# Altium PCB 24v_to_12v_adapter.PcbDoc
Units mm, origin at the board's own origin, x right, y up, seen from the top; angles counter-clockwise.
Board outline 34.61 x 21.07 mm, 2 copper layers (Top Layer, Bottom Layer); 1 components, 3 nets, 9 pads, 0 vias.
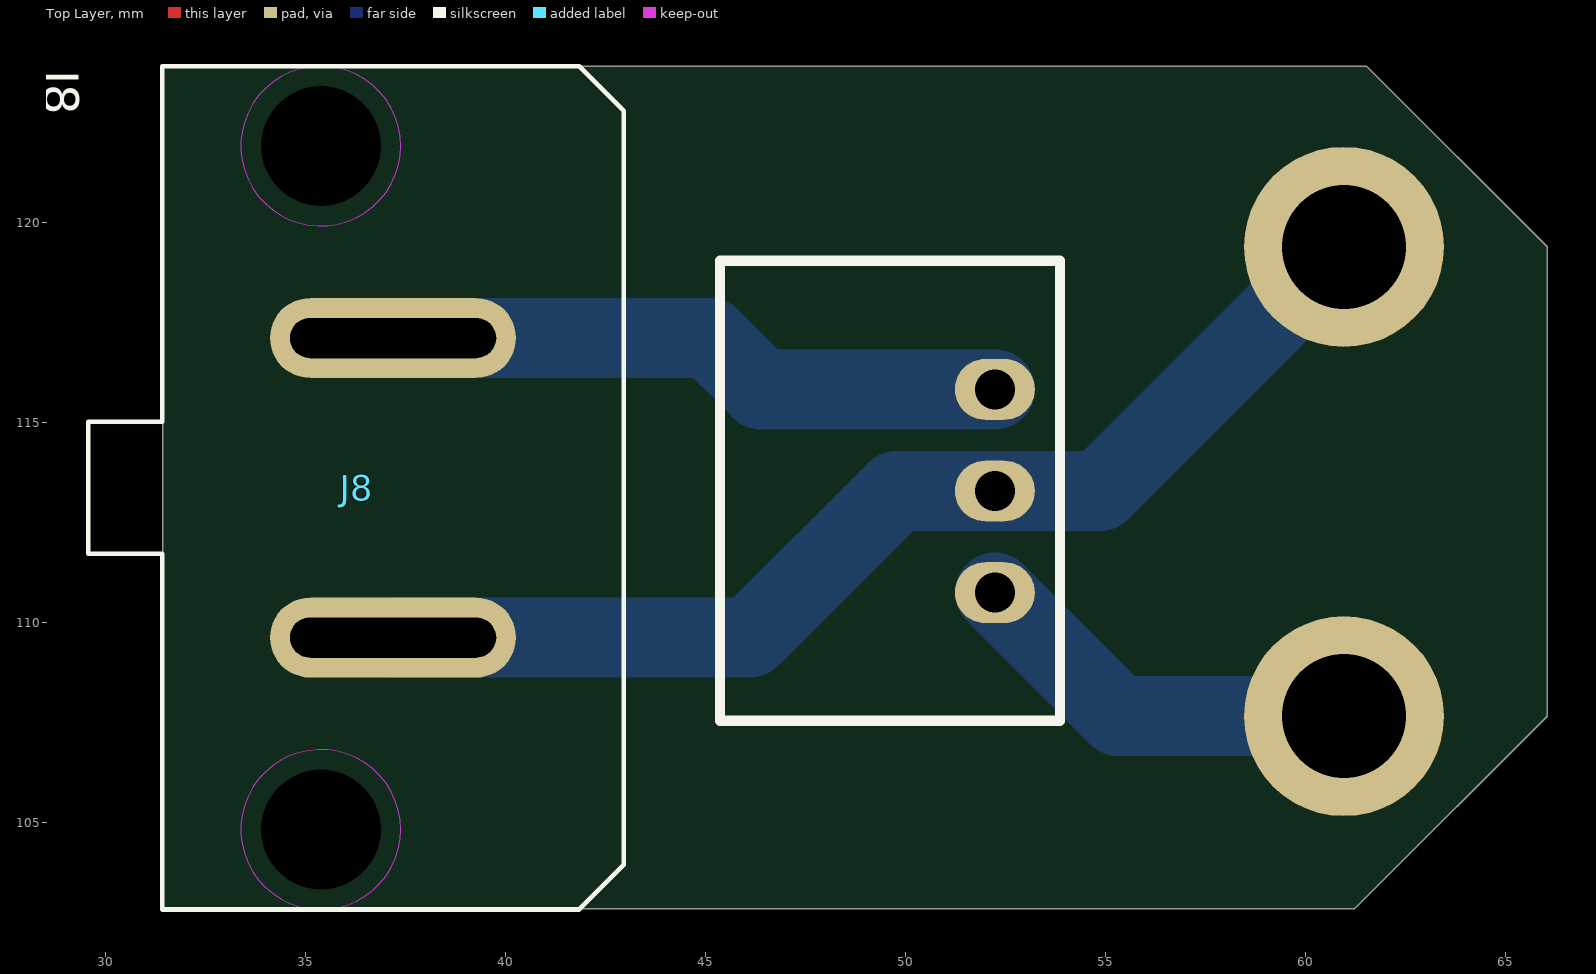
[diagram p0: Top Layer view]
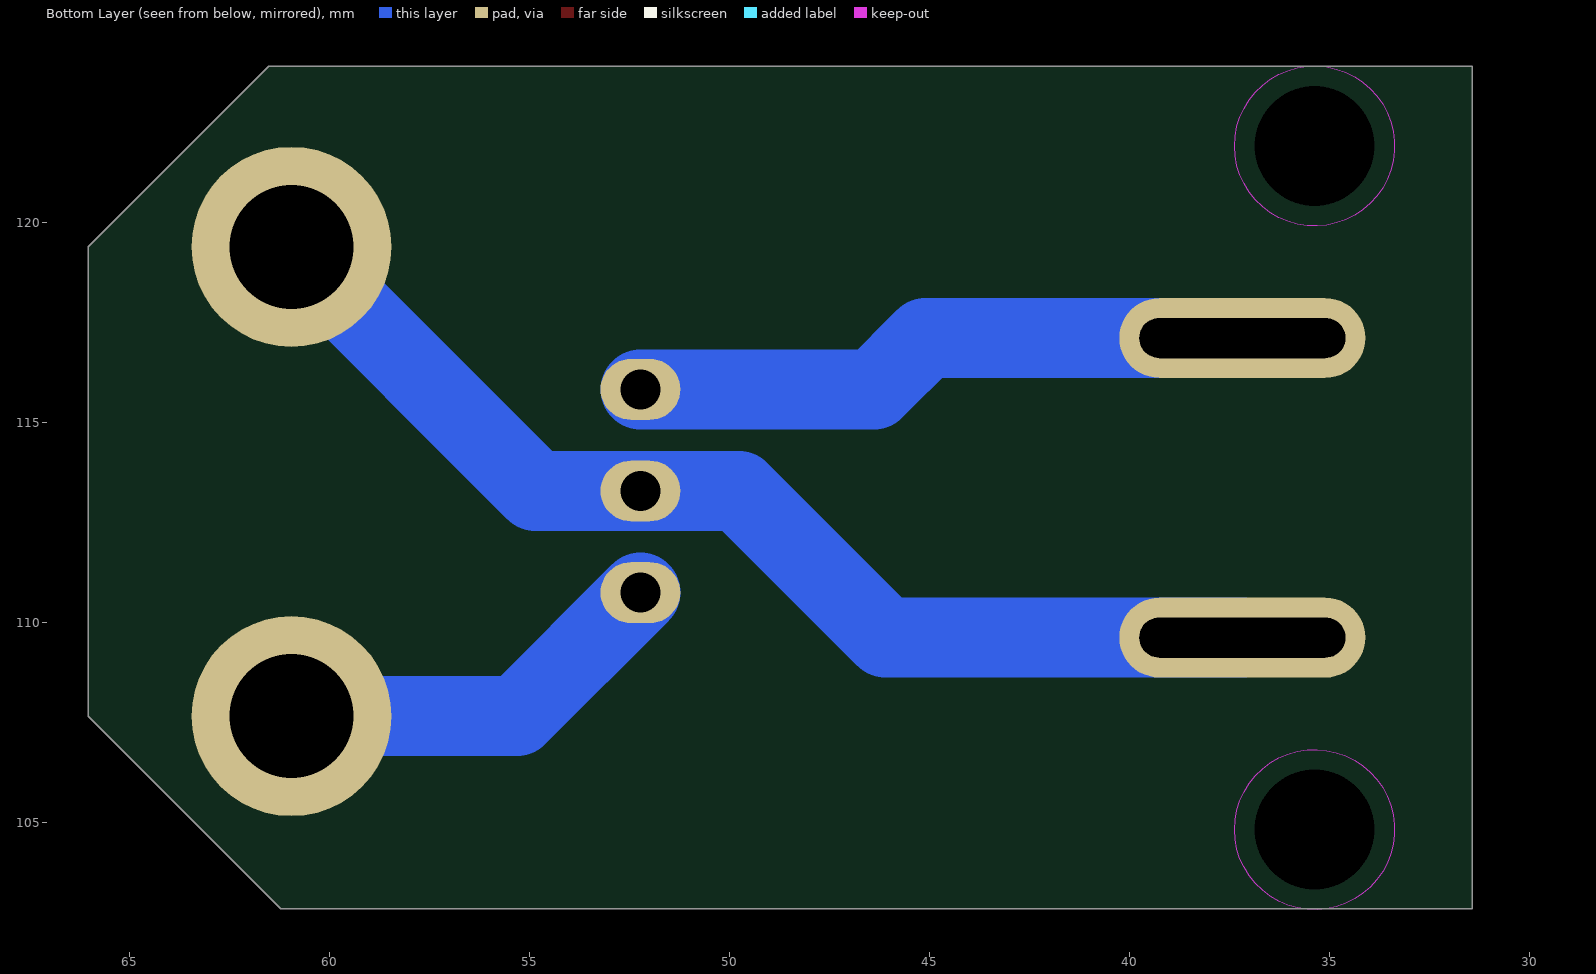
[diagram p1: Bottom Layer view, seen from below]

## Layer stack, top to bottom
Top Solder: solder mask 0.0102, Solder Resist, Dk 3.5
Top Layer: signal copper 0.0356
Dielectric 1: dielectric 0.32, FR-4, Dk 4.8
Bottom Layer: signal copper 0.0356
Bottom Solder: solder mask 0.0102, Solder Resist, Dk 3.5

## Board outline
31.433,102.831 31.433,123.896 61.524,123.896 66.04,119.38 66.04,107.646 61.524,103.13 61.225,102.831

## Design rules (kind name [scope] priority, off if disabled: settings)
Clearance [All] p1: gap=0.254 ignorepadtopadclearanceinfootprint=FALSE except(0: Arc-Hole Track-Hole SMDPad-Hole THPad-Hole Via-Hole Fill-Hole Poly-Hole Region-Hole Text-Hole)
PolygonConnect [All] p1: connectstyle=Relief reliefconductorwidth=0.254 reliefentries=4 polygonreliefangle="90 Angle" airgapwidth=0.254
RoutingVias [All] p1: holewidth=0.711 width=1.27 viastyle="Through Hole" minholewidth=0.711 minwidth=1.27 maxholewidth=0.711 maxwidth=1.27
SolderMaskExpansion [All] p1: expansion=0.102 istentingtop=FALSE
Width [All] p1: maxlimit=5 minlimit=0.254 preferedwidth=0.254
30 further rules are at their usual default settings.

## Components (designator, comment, footprint, x,y, rotation, side; value= is the part's Value field where it differs from the comment)
J8 "172042-0201" MOLEX_1720420201 37.186,113.356 r270 top

## Footprints (in the part's own frame and the unit in brackets; to place one, negate y for a bottom-side part, rotate by r counter-clockwise, add the part's x,y. Pads: shape width x height; smd on the part's side, far side on the other; paste and mask are expansions set on the pad)
MOLEX_1720420201 [mm] "Connector, Power Entry; 2 pin, 21.08 mm L X 11.53 mm W X 14.76 mm H body"
  rrect100% 2x6.15 hole 1 slot 5.15 at 90 deg paste-6.15: 1(-3.745,0) 2(3.745,0)
  round 1 hole 3 unplated paste-1 mask+1: 3(-8.545,-1.805) 4(8.545,-1.805)
  Keep-Out Layer circle w0.025: c8.545,-1.805 r2
  Keep-Out Layer circle w0.025: c-8.545,-1.805 r2
  silkscreen extent -10.54,-7.62 10.54,5.77, body extent -10.54,-7.61 10.54,5.78, height 14.91

## Part data
J8: "Conn Power HDR 2 POS 7.49mm Solder ST Thru-Hole 2 Terminal 1 Port Super Sabre™ Frame", Color=Black, Current Rating=30A, Manufacturer=Molex, Max Operating Temperature=125°C, Min Operating Temperature=-40°C, Supplier Part Number 1=WM16204-ND, Voltage Rating=600V, Category="Headers and Wire Housings", ComponentLink1Description=https://www.mouser.com/ds/2/276/1720420201_PCB_HEADERS-704088.pdf?src-supplier=Mouser, ComponentLink1URL=https://www.mouser.com/ds/2/276/1720420201_PCB_HEADERS-704088.pdf?src-supplier=Mouser, ComponentLink2Description=http://www.molex.com/pdm_docs/sd/1720420201_sd.pdf?src-supplier=Digi-Key, ComponentLink2URL=http://www.molex.com/pdm_docs/sd/1720420201_sd.pdf?src-supplier=Digi-Key, Contact Material=Copper, Contact Plating=Silver, Fastening Type=Ramp, Insulation Material=Polymer, Manufacturer Part Number=172042-0201, Mount="Through Hole", Number of Circuits=2, Number of Pins=2, Number of Positions=2, Number of Rows=1, Orientation=Vertical, Packaging=Tray, Pitch=0.295inch, Pricing 1="1=1.81000, 10=1.54100, 80=1.27263, 1050=1.00470, 5250=0.89083, 10500=0.87073 (USD)", RoHS=Yes, Stock 1=5706, Supplier 1=Digi-Key, Termination=Solder

## Free pads (board coordinates)
  oval 2x1.524 hole 1: 1(52.233,115.816) 2(52.233,113.276) 3(52.233,110.736)
  round 5 hole 3.1: 6(60.96,107.646) 6(60.96,119.38)

## Nets (pads, with @x,y where several pads share a name; then routed paths per layer and width w, separated by ;. In a path a pad name is that pad's centre, name@x,y a point inside that pad or via, vN(x,y) a via of type N, cw(c..) or ccw(c..) an arc to the next point about the centre after c; other vN are vias at no path point)
GND: J8.2 pad.2 pad.6@60.96,119.38 | length 27.8
  Bottom Layer w2: J8.2 46.111,109.611 49.776,113.276 pad.2 54.856,113.276 pad.6@60.96,119.38
VIN: J8.1 pad.1 | length 15.6
  Bottom Layer w2: J8.1 45.105,117.101 46.39,115.816 pad.1
VOUT: pad.3 pad.6@60.96,107.646 | length 10
  Bottom Layer w2: pad.3 55.324,107.646 pad.6@60.96,107.646
pads on no net: J8.3 J8.4

## Silkscreen, mask and mechanical layers (free items; w line width, h text height)
Top Overlay:
  lines w0.254: 45.359,107.532 53.859,107.532 53.859,119.032 45.359,119.032 45.359,107.532
Mechanical 12:
  the board outline again, w0.254